# Altium PCB Luna_Board_PCB_D0.PcbDoc (part 2 of 2)
Units mm, origin at the board's own origin, x right, y up, seen from the top; angles counter-clockwise.
Board outline 53.97 x 25.4 mm, 4 copper layers (Top Layer, Layer 1, Layer 2, Bottom Layer), stack 1.587 mm thick; 65 components, 71 nets, 287 pads, 168 vias.
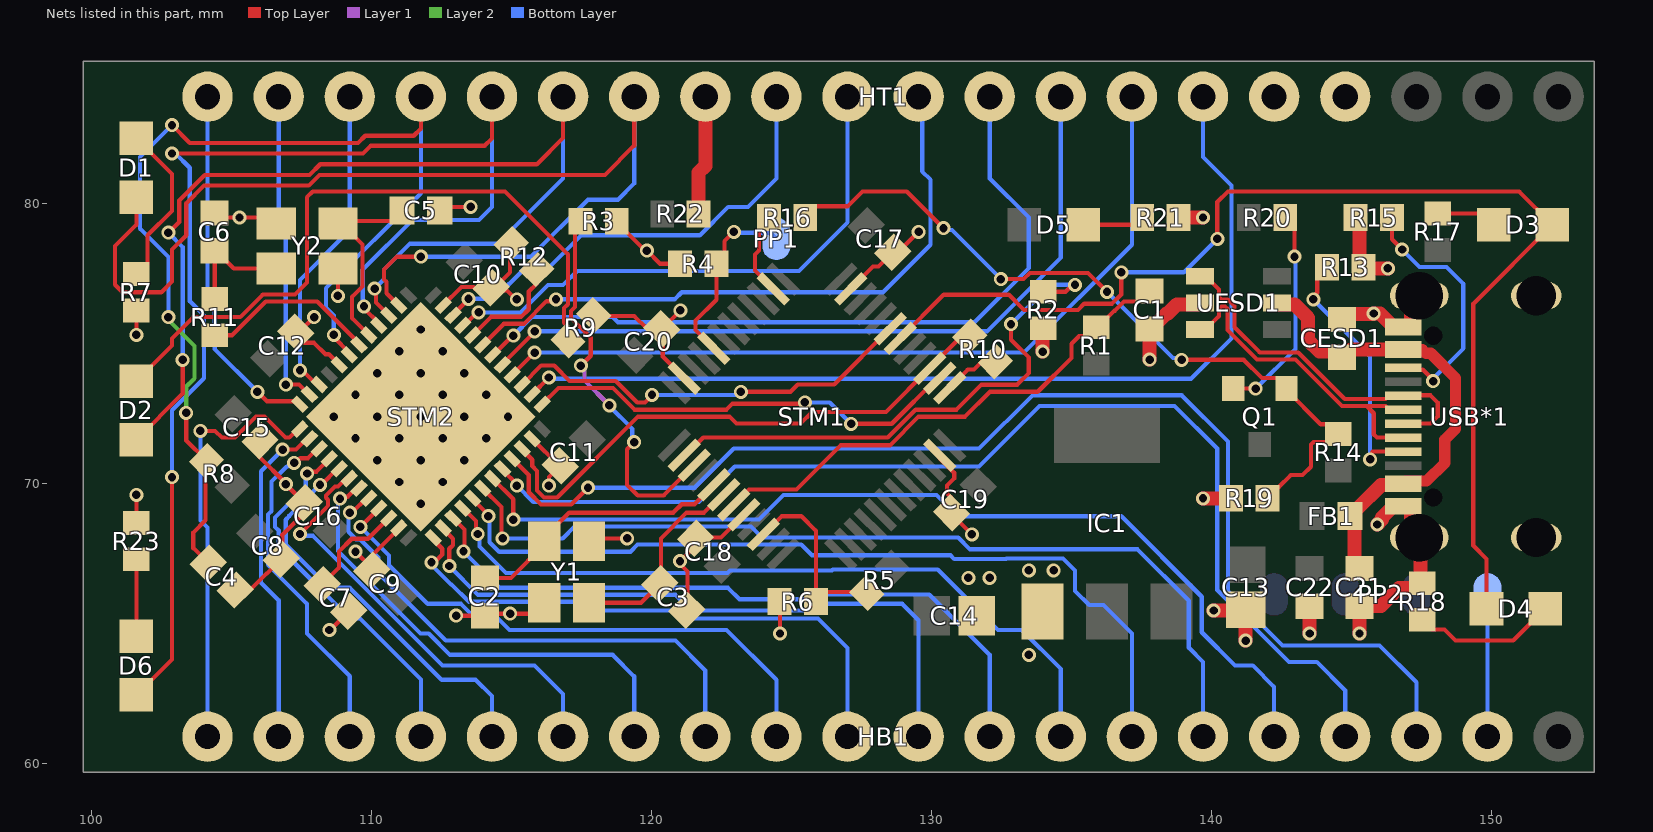
[diagram p4: the nets of this part, all layers, seen from the top]

## Via types
v1: diameter 0.5, hole 0.3, Top Layer to Bottom Layer, 168 vias

## Nets (pads, with @x,y where several pads share a name; then routed paths per layer and width w, separated by ;. In a path a pad name is that pad's centre, name@x,y a point inside that pad or via, vN(x,y) a via of type N, cw(c..) or ccw(c..) an arc to the next point about the centre after c; other vN are vias at no path point) (continued)
GND: C1.1 C2.1 C3.1 C4.1 C5.1 C6.1 C7.2 C8.1 C9.1 C10.1 C11.1 C12.1 C13.1 C14.1 C15.1 C16.1 C17.1 C18.1 C19.1 C20.1 C21.2 C22.2 CESD1.1 HB1.2 HT1.4 HT1.5 IC1.1 PP2.4 R2.1 R3.1 R4.1 R6.1 R7.2 R9.2 R12.1 R13.2 R15.2 R18.2 R19.1 R21.2 R23.2 STM1.8 STM1.23 STM1.35 STM1.47 STM2.8 STM2.23 STM2.35 STM2.47 UESD1.2 USB*1.1 USB*1.12 USB*1.13 Y1.2 Y1.4 Y2.2 Y2.4 | length 82.7
  Top Layer w0.15: R23.2@101.6,68.595 v1(101.6,69.596) ; v1(101.6,75.311) R7.2@101.6,76.185 ; C6.1@104.394,79.669 104.561,79.502 v1(105.283,79.502) 106.38,79.502 Y2.2@106.596,79.286 ; C4.1@105.125,66.198 105.656,66.198 106.246,66.789 106.264,66.789 106.812,67.337 106.812,68.17 107.6,68.958 C16.1@107.6,69.311 v1(106.934,69.977) 106.934,70.011 105.979,70.966 105.979,71.496 C15.1@106.014,71.532 ; C12.1@107.284,75.469 C12.1@107.284,75.407 107.411,75.407 v1(107.95,75.946) ; C12.1@107.411,75.026 107.942,75.026 108.351,74.617 108.472,74.617 STM2.8@108.843,74.246 ; v1(108.49,64.77) 108.524,64.77 C7.2@109.189,65.436 ; v1(108.796,76.708) Y2.4@108.796,77.686 ; v1(109.427,67.564) C9.1@110.013,66.978 ; C9.1@110.013,66.898 C9.1@110.013,66.978 ; STM2.23@110.965,68.413 110.965,68.38 110.013,67.429 C9.1@110.013,66.978 ; C5.1@112.435,79.756 112.562,79.883 v1(113.538,79.883) ; STM2.47@112.555,76.367 113.213,77.025 113.636,77.025 113.704,76.957 113.951,76.957 C10.1@114.057,76.851 ; v1(113.018,65.278) C2.1@114.046,65.278 114.119,65.351 v1(114.948,65.351) 115.776,65.351 Y1.2@116.167,65.742 ; C10.1@114.269,76.866 114.948,77.544 114.948,78.529 R12.1@114.983,78.565 ; C10.1@114.305,76.901 114.835,76.901 115.155,76.581 v1(115.189,76.581) ; STM2.35@115.737,71.595 116.689,70.643 C11.1@116.744,70.643 116.332,70.231 v1(116.332,69.926) ; Y1.4@117.767,67.942 117.866,68.041 v1(119.126,68.041) ; R9.2@117.935,76.025 117.97,75.989 119.38,75.989 119.835,75.534 C20.1@120.365,75.534 ; R3.1@118.76,79.375 118.76,79.325 119.766,78.319 v1(119.835,78.319) 120.303,77.851 R4.1@121.016,77.851 ; v1(121.031,76.185) 120.38,75.534 C20.1@120.365,75.534 ; STM1.47@121.169,73.769 120.401,74.537 120.401,75.499 C20.1@120.365,75.534 ; C3.1@121.254,65.466 121.29,65.502 121.29,66.856 121.016,67.13 v1(121.016,67.225) 121.57,67.778 C18.1@121.57,68.041 121.605,68.077 122.477,68.077 STM1.8@123.29,68.89 ; R6.1@124.572,65.786 124.587,65.771 v1(124.587,64.643) ; STM1.35@127.109,76.951 127.908,77.75 128.108,77.75 C17.1@128.62,78.263 128.809,78.263 v1(129.54,78.994) ; STM1.23@130.291,71.011 130.291,70.905 130.81,70.386 130.81,70.18 130.556,69.926 130.556,69.647 130.714,69.49 C19.1@130.714,68.959 130.714,68.914 v1(131.445,68.183)
  Top Layer w0.5: v1(133.971,74.709) 133.971,75.536 R2.1@133.985,75.55 ; v1(137.795,74.426) C1.1@137.795,75.525 137.845,75.525 138.395,76.075 138.44,76.075 138.769,76.404 139.545,76.404 UESD1.2@139.595,76.454 ; R21.2@138.826,79.502 v1(139.7,79.502) ; v1(139.7,69.473) 140.697,69.473 R19.1@140.701,69.469 ; v1(140.081,65.466) 141.196,65.466 C13.1@141.224,65.494 v1(141.224,64.389) ; v1(143.51,64.643) C22.2@143.51,65.619 ; CESD1.1@144.659,75.859 144.859,76.059 145.782,76.059 v1(145.796,76.073) 146.014,76.073 146.497,75.59 USB*1.12@146.847,75.59 147.085,75.59 147.135,75.64 147.135,76.479 147.366,76.71 USB*1.13@147.422,76.71 ; R15.2@145.146,79.502 145.288,79.36 145.288,77.866 R13.2@145.43,77.724 145.468,77.686 v1(146.304,77.686) ; v1(145.288,64.643) C21.2@145.288,65.619 146.053,65.619 146.695,66.261 147.354,66.261 R18.2@147.529,66.436 147.476,66.489 147.476,68.017 USB*1.13@147.422,68.07 147.366,68.07 147.135,68.301 147.135,69.14 147.085,69.19 USB*1.1@146.847,69.19 146.497,69.19 146.098,68.79 146.098,68.711 v1(145.923,68.536)
  Bottom Layer w0.15: HB1.2@149.86,60.96 PP2.4@149.86,66.04
  other v1: 133.477,63.881 131.318,66.628 132.08,66.628 133.477,66.898 134.366,66.898 111.76,69.279 110.982,70.057 112.538,70.057 110.204,70.834 111.76,70.834 113.316,70.834 109.427,71.612 110.982,71.612 112.538,71.612 114.093,71.612 108.649,72.39 110.204,72.39 111.76,72.39 113.316,72.39 114.871,72.39 109.427,73.168 110.982,73.168 112.538,73.168 114.093,73.168 110.204,73.946 111.76,73.946 113.316,73.946 110.982,74.723 112.538,74.723 111.76,75.501
LED: D3.2 D4.1 STM1.30 | length 42.7
  Top Layer w0.15: STM1.30@128.877,75.183 130.44,76.746 132.759,76.746 133.306,76.2 135.231,76.2 135.456,76.425 136.447,76.425 136.779,76.757 v1(136.779,77.544) ; v1(140.208,78.74) 140.208,80.054 140.589,80.435 150.993,80.435 D3.2@152.18,79.248 149.352,76.42 149.352,67.784 149.826,67.31 D4.1@149.826,65.532
  Bottom Layer w0.15: v1(136.779,77.544) 139.012,77.544 v1(140.208,78.74)
MCU_PA0: HT1.18 STM2.10 | length 11.4
  Top Layer w0.15: v1(107.442,74.041) 107.537,74.041 108.039,73.539 STM2.10@108.136,73.539
  Bottom Layer w0.15: v1(107.442,74.041) 107.442,77.276 109.22,79.054 HT1.18@109.22,83.82
MCU_PA1: HT1.19 STM2.11 | length 11.4
  Top Layer w0.15: v1(106.934,73.533) 107.409,73.533 107.757,73.185 STM2.11@107.783,73.185
  Bottom Layer w0.15: HT1.19@106.68,83.82 106.68,79.054 106.934,78.8 v1(106.934,73.533)
MCU_PA2: HT1.20 STM2.12 | length 13
  Top Layer w0.15: v1(105.918,73.279) 106.259,72.938 107.323,72.938 STM2.12@107.429,72.832
  Bottom Layer w0.15: HT1.20@104.14,83.82 104.14,76.854 104.394,76.6 104.394,74.803 v1(105.918,73.279)
MCU_PA3: HB1.20 STM2.13 | length 15.4
  Top Layer w0.15: v1(103.886,71.882) 104.409,71.882 104.651,71.64 105.124,71.64 105.873,72.389 106.178,72.389 106.928,71.64 107.061,71.64 107.369,71.948 STM2.13@107.429,71.948
  Bottom Layer w0.15: v1(103.886,71.882) 103.886,68.682 104.14,68.428 HB1.20@104.14,60.96
MCU_PA4: HB1.19 STM2.14 | length 11.9
  Top Layer w0.15: v1(106.826,71.212) 106.833,71.219 107.301,71.219 107.676,71.595 STM2.14@107.783,71.595
  Bottom Layer w0.15: HB1.19@106.68,60.96 106.68,65.83 106.053,66.457 106.053,70.439 v1(106.826,71.212)
MCU_PA5: HB1.18 STM2.15 | length 12.6
  Top Layer w0.15: v1(107.232,70.743) 107.284,70.743 107.448,70.907 107.728,70.907 108.062,71.241 STM2.15@108.136,71.241
  Bottom Layer w0.15: v1(107.232,70.743) 107.137,70.743 107.007,70.612 106.968,70.612 106.426,70.07 106.426,69.013 106.303,68.89 106.303,67.096 107.696,65.703 107.696,64.643 109.22,63.119 HB1.18@109.22,60.96
MCU_PA6: HB1.17 STM2.16 | length 13.2
  Top Layer w0.15: v1(107.696,70.358) 107.763,70.425 108.027,70.425 STM2.16@108.49,70.887
  Bottom Layer w0.15: v1(107.696,70.358) 107.649,70.311 107.649,69.883 106.553,68.787 106.553,68.453 106.684,68.322 106.684,67.726 109.228,65.182 109.583,65.182 111.76,63.005 HB1.17@111.76,60.96
MCU_PA7: HB1.16 STM2.17 | length 14.6
  Top Layer w0.15: v1(108.157,69.956) 108.211,69.956 108.789,70.534 STM2.17@108.843,70.534
  Bottom Layer w0.15: v1(108.157,69.956) 107.061,68.861 107.061,68.834 106.934,68.707 106.934,67.829 108.487,66.276 109.22,66.276 112.504,62.992 113.716,62.992 114.3,62.408 HB1.16@114.3,60.96
MCU_PA8: HB1.7 STM2.29 | length 30.4
  Top Layer w0.15: STM2.29@113.616,69.473 113.616,69.432 114.173,68.875 v1(114.173,68.834)
  Bottom Layer w0.15: v1(114.173,68.834) 114.217,68.79 114.217,67.904 114.557,67.564 119.25,67.564 119.504,67.818 125.349,67.818 125.73,67.437 130.683,67.437 130.81,67.31 132.669,67.31 132.683,67.323 134.703,67.323 135.128,66.898 135.128,66.167 135.636,65.659 136.144,65.659 137.16,64.643 HB1.7@137.16,60.96
MCU_PA9: HB1.6 STM2.30 | length 32.9
  Top Layer w0.15: STM2.30@113.97,69.827 114.637,69.159 114.637,68.085 v1(114.681,68.041)
  Bottom Layer w0.15: v1(114.681,68.041) 116.826,68.041 117.251,68.466 123.558,68.466 123.952,68.072 130.955,68.072 131.377,67.65 137.356,67.65 139.192,65.813 139.192,64.135 139.7,63.627 HB1.6@139.7,60.96
MCU_PA10: HB1.5 STM2.31 | length 34.7
  Top Layer w0.15: STM2.31@114.323,70.18 115.062,69.442 v1(115.062,68.707)
  Bottom Layer w0.15: v1@115.062,68.716 123.834,68.716 124.714,69.596 130.175,69.596 130.937,68.834 136.779,68.834 139.656,65.957 139.656,64.687 140.843,63.5 141.478,63.5 142.24,62.738 HB1.5@142.24,60.96
MCU_PA11: HB1.4 STM2.32 | length 40.9
  Top Layer w0.15: STM2.32@114.677,70.534 114.677,70.486 115.189,69.974 v1(115.189,69.926)
  Bottom Layer w0.15: v1(115.189,69.926) 115.773,69.342 121.7,69.342 122.97,70.612 131.699,70.612 133.858,72.771 138.684,72.771 140.208,71.247 140.208,66.194 142.775,63.627 143.764,63.627 144.78,62.611 HB1.4@144.78,60.96
MCU_PA12: HB1.3 STM2.33 | length 44.3
  Top Layer w0.15: STM2.33@115.03,70.887 115.614,70.304 115.614,69.69 116.052,69.251 117.13,69.251 v1(117.729,69.85)
  Bottom Layer w0.15: v1(117.729,69.85) 121.54,69.85 122.937,71.247 131.699,71.247 133.604,73.152 138.938,73.152 140.589,71.501 140.589,66.167 142.538,64.218 146.006,64.218 147.32,62.904 HB1.3@147.32,60.96
MCU_PA15: HT1.6 STM2.38 | length 34.9
  Top Layer w0.15: STM2.38@115.737,73.185 115.737,73.189 116.332,73.784 v1(116.332,73.787)
  Bottom Layer w0.15: v1(116.332,73.787) 116.376,73.743 139.275,73.743 140.716,75.184 140.716,80.645 139.7,81.661 HT1.6@139.7,83.82
MCU_PB0: HB1.15 STM2.18 | length 16.2
  Top Layer w0.15: v1(107.442,68.199) 108.446,69.203 108.446,69.419 108.37,69.496 108.37,69.569 108.695,69.894 108.804,69.894 109.091,70.18 STM2.18@109.197,70.18
  Bottom Layer w0.15: v1(107.442,68.199) 107.509,68.132 107.904,68.132 112.536,63.5 115.824,63.5 116.84,62.484 HB1.15@116.84,60.96
MCU_PB1: HB1.14 STM2.19 | length 17.3
  Top Layer w0.15: v1(108.871,69.461) 108.938,69.528 109.145,69.528 109.444,69.827 STM2.19@109.55,69.827
  Bottom Layer w0.15: v1(108.871,69.461) 108.804,69.394 108.804,69.147 108.795,69.137 108.795,67.595 111.747,64.643 112.041,64.643 112.803,63.881 118.613,63.881 119.38,63.114 HB1.14@119.38,60.96
MCU_PB2: HB1.13 STM2.20 | length 19.1
  Top Layer w0.15: v1(109.22,68.961) 109.306,68.961 109.818,69.473 STM2.20@109.904,69.473
  Bottom Layer w0.15: v1(109.22,68.961) 109.176,68.917 109.176,68.277 109.444,68.008 109.583,68.008 110.236,67.356 110.236,66.802 112.649,64.389 120.853,64.389 121.92,63.322 HB1.13@121.92,60.96
MCU_PB4: HT1.7 STM2.40 | length 29.3
  Top Layer w0.15: STM2.40@115.03,73.893 115.035,73.893 115.819,74.676 v1(115.824,74.676)
  Bottom Layer w0.15: v1(115.824,74.676) 133.304,74.676 137.16,78.532 HT1.7@137.16,83.82
MCU_PB5: HT1.8 STM2.41 | length 27.3
  Top Layer w0.15: STM2.41@114.677,74.246 114.677,74.268 115.824,75.416 v1(115.824,75.438)
  Bottom Layer w0.15: v1(115.824,75.438) 131.987,75.438 134.62,78.071 HT1.8@134.62,83.82
MCU_PB6: HT1.9 STM2.42 | length 27.3
  Top Layer w0.15: STM2.42@114.323,74.6 114.352,74.6 115.033,75.28 v1(115.062,75.28)
  Bottom Layer w0.15: v1(115.062,75.28) 115.728,75.946 118.613,75.946 118.799,75.76 131.535,75.76 133.477,77.702 133.477,79.502 132.08,80.899 HT1.9@132.08,83.82
MCU_PB7: HT1.10 STM2.43 | length 22.9
  Top Layer w0.15: STM2.43@113.97,74.953 114.721,75.705 115.445,75.705 116.254,76.514 116.519,76.514 v1(116.586,76.581)
  Bottom Layer w0.15: v1(116.586,76.581) 120.826,76.581 121.08,76.835 128.27,76.835 129.965,78.53 129.965,80.855 129.667,81.153 129.667,83.693 HT1.10@129.54,83.82
MCU_PB8: HT1.11 STM2.45 | length 19.7
  Top Layer w0.15: STM2.45@113.263,75.66 113.316,75.66 113.768,76.112 v1(113.821,76.112)
  Bottom Layer w0.15: v1(113.821,76.112) 115.321,76.112 116.298,77.089 116.84,77.089 117.348,77.597 125.266,77.597 127,79.331 HT1.11@127,83.82
MCU_PB9: HT1.12 STM2.46 | length 16.5
  Top Layer w0.15: STM2.46@112.909,76.014 112.909,76.032 113.46,76.582 v1(113.46,76.6)
  Bottom Layer w0.15: v1(113.46,76.6) 114.381,76.6 115.505,77.724 116.332,77.724 117.475,78.867 121.722,78.867 122.738,79.883 123.444,79.883 124.46,80.899 HT1.12@124.46,83.82
MCU_PB10: HB1.12 STM2.21 | length 20.3
  Top Layer w0.15: v1(109.601,68.453) 109.601,68.458 110.257,69.115 STM2.21@110.257,69.12
  Bottom Layer w0.15: v1(109.601,68.453) 110.626,67.428 110.626,67.081 112.004,65.703 113.194,65.703 113.716,65.182 114.516,65.182 114.928,64.77 122.682,64.77 124.46,62.992 HB1.12@124.46,60.96
MCU_PB12: HB1.11 STM2.25 | length 20.6
  Top Layer w0.15: v1(112.141,67.183) 112.239,67.183 112.522,67.466 112.522,67.671 112.202,67.991 STM2.25@112.202,68.059
  Bottom Layer w0.15: v1(112.141,67.183) 112.141,67.09 112.832,66.399 112.852,66.399 113.475,65.776 117.928,65.776 118.237,65.466 121.058,65.466 121.343,65.182 125.944,65.182 127,64.125 HB1.11@127,60.96
MCU_PB13: HB1.10 STM2.26 | length 23.5
  Top Layer w0.15: STM2.26@112.555,68.413 112.555,68.374 112.903,68.027 112.903,67.798 112.776,67.671 v1(112.776,67.056)
  Bottom Layer w0.15: v1(112.776,67.056) 113.806,66.026 120.853,66.026 121.412,65.466 126.008,65.466 126.245,65.703 128.954,65.703 129.54,65.117 HB1.10@129.54,60.96
MCU_PB14: HB1.9 STM2.27 | length 24.8
  Top Layer w0.15: STM2.27@112.909,68.766 113.315,68.36 113.315,67.608 v1(113.284,67.577)
  Bottom Layer w0.15: v1(113.284,67.577) 114.586,66.276 122.734,66.276 123.141,65.869 126.057,65.869 126.228,66.04 129.921,66.04 132.08,63.881 HB1.9@132.08,60.96
MCU_PB15: HB1.8 STM2.28 | length 26.7
  Top Layer w0.15: STM2.28@113.263,69.12 113.725,68.657 113.725,68.266 v1(113.792,68.199)
  Bottom Layer w0.15: v1(113.792,68.199) 113.859,68.132 113.859,67.747 114.806,66.8 122.71,66.8 122.809,66.898 126.448,66.898 126.475,66.925 130.224,66.925 132.379,64.77 133.223,64.77 134.62,63.373 HB1.8@134.62,60.96
MCU_PC13: D1.1 HT1.14 STM2.2 | length 42.2
  Top Layer w0.15: D1.1@101.6,80.23 101.6,79.248 100.838,78.486 100.838,77.1 101.103,76.835 102.489,76.835 102.87,77.216 102.87,78.359 103.378,78.867 103.378,80.01 104.013,80.645 107.757,80.645 108.138,81.026 118.337,81.026 119.38,82.069 HT1.14@119.38,83.82 ; STM2.2@110.965,76.367 110.534,76.798 110.534,77.206 110.446,77.294 110.446,77.646 110.905,78.105 v1(111.76,78.105)
  Bottom Layer w0.15: v1(111.76,78.105) 115.697,78.105 117.729,80.137 118.799,80.137 119.38,80.718 HT1.14@119.38,83.82
MCU_PC14: D2.1 HT1.15 STM2.3 | length 38.4
  Top Layer w0.15: D2.1@101.6,71.56 103.251,73.211 v1(103.251,74.422) ; v1(102.743,78.96) 103.128,79.345 103.128,80.114 104.04,81.026 107.785,81.026 108.166,81.407 115.903,81.407 116.84,82.344 HT1.15@116.84,83.82 ; v1(110.109,76.962) 110.153,76.918 110.153,76.472 STM2.3@110.611,76.014
  Bottom Layer w0.15: v1(102.743,78.96) 103.251,78.452 v1(103.251,74.422) ; v1(110.109,76.962) 110.446,77.299 110.446,77.646 111.369,78.569 114.51,78.569 116.84,80.899 HT1.15@116.84,83.82
MCU_PC15: D6.1 HT1.16 STM2.4 | length 45.7
  Top Layer w0.15: D6.1@101.6,62.45 102.87,63.72 v1(102.87,70.231) ; v1(102.87,81.788) 109.691,81.788 109.972,82.069 114.044,82.069 114.305,82.33 114.305,83.815 HT1.16@114.3,83.82 ; v1(109.728,76.327) 109.728,76.258 110.257,75.729 STM2.4@110.257,75.66
  Bottom Layer w0.15: v1(102.87,70.231) 102.87,72.62 104.013,73.763 104.013,76.006 103.505,76.514 103.505,81.28 102.997,81.788 v1(102.87,81.788) ; v1(109.728,76.327) 109.684,76.371 109.684,77.646 111.457,79.419 113.836,79.419 114.3,79.883 HT1.16@114.3,83.82
MCU_VBAT: HT1.13 R22.2 | length 4.3
  Top Layer w0.5: R22.2@121.681,79.629 121.681,81.113 121.92,81.352 HT1.13@121.92,83.82
NetC1_2: C1.2 R1.2 STM1.7 | length 18.3
  Top Layer w0.15: STM1.7@122.937,69.243 123.485,69.791 125.182,69.791 126.755,71.365 128.515,71.365 129.54,72.389 131.198,72.389 132.088,73.279 133.794,73.279 135.001,74.486 135.001,74.992 135.271,75.263 135.573,75.263 R1.2@135.89,75.58 135.94,75.58 136.535,76.175 136.551,76.175 136.876,76.5 137.42,76.5 C1.2@137.795,76.875
NetC2_2: C2.2 STM1.5 Y1.1 | length 9.7
  Top Layer w0.15: C2.2@114.046,66.628 114.978,66.628 116.167,67.817 Y1.1@116.167,67.942 116.167,68.067 117.059,68.959 120.777,68.959 121.078,69.26 121.54,69.26 STM1.5@122.23,69.95
NetC3_2: C3.2 STM1.6 Y1.3 | length 7.3
  Top Layer w0.15: Y1.3@117.767,65.742 119.621,65.742 C3.2@120.3,66.421 120.335,66.456 120.335,68.042 121.252,68.959 121.876,68.959 122.514,69.597 STM1.6@122.583,69.597
NetC6_2: C6.2 R11.1 Y2.3 | length 4.2
  Top Layer w0.15: R11.1@104.394,76.596 C6.2@104.394,78.319 104.444,78.319 105.077,77.686 Y2.3@106.596,77.686
NetC7_1: C7.1 STM2.22 | length 3.7
  Top Layer w0.15: C7.1@108.235,66.39 108.839,66.995 108.839,67.577 109.29,68.028 109.873,68.028 STM2.22@110.611,68.766
NetD1_2: D1.2 R7.1 | length 5.9
  Top Layer w0.15: R7.1@101.6,77.485 101.65,77.485 102,77.835 102,78.869 102.87,79.739 102.87,81.06 D1.2@101.6,82.33
NetD2_2: D2.2 R9.1 | length 24.3
  Top Layer w0.15: D2.2@101.6,73.66 102.87,74.93 102.87,75.183 103.633,75.946 105.31,75.946 106.114,76.75 107.267,76.75 107.696,77.179 107.696,80.23 107.897,80.431 114.768,80.431 117.011,78.188 117.011,76.405 116.873,76.267 116.873,75.743 117.015,75.6 R9.1@117.015,75.105
NetD3_1: D3.1 R17.2 | length 2.2
  Top Layer w0.15: R17.2@148.082,79.644 149.684,79.644 D3.1@150.08,79.248
NetD4_2: D4.2 R18.1 | length 5.2
  Top Layer w0.15: R18.1@147.529,65.136 147.879,64.786 148.32,64.786 148.717,64.389 150.783,64.389 D4.2@151.926,65.532
NetD5_2: D5.2 R21.1 | length 2.2
  Top Layer w0.15: D5.2@135.416,79.248 137.272,79.248 R21.1@137.526,79.502
NetD6_2: D6.2 R23.1 | length 2.7
  Top Layer w0.15: D6.2@101.6,64.55 R23.1@101.6,67.295
NetPP1_1: PP1.1 R4.2 STM1.44 | length 6.6
  Top Layer w0.15: STM1.44@122.23,74.83 121.57,75.49 121.57,75.819 122.316,76.565 R4.2@122.316,77.851 122.601,78.136 122.601,78.658 v1(122.937,78.994)
  Bottom Layer w0.15: v1(122.937,78.994) 122.97,78.96 124.24,78.96 PP1.1@124.46,78.74
NetQ1_1: Q1.1 R14.1 R16.1 R19.2 | length 27.3
  Top Layer w0.15: R16.1@125.491,79.502 125.491,79.552 125.841,79.902 127.004,79.902 127.537,80.435 129.115,80.435 v1(130.429,79.121) ; v1(132.478,77.304) 133.292,77.304 133.514,77.526 135.595,77.526 v1(136.271,76.85) ; v1(138.938,74.422) 141.151,74.422 141.808,73.765 142.357,73.765 142.682,73.44 Q1.1@142.682,73.39 142.682,73.34 143.902,72.12 144.176,72.12 R14.1@144.526,71.77 144.234,71.478 143.641,71.478 143.554,71.39 143.554,70.602 143.256,70.304 142.836,70.304 142.401,69.869 142.351,69.869 142.001,69.519 R19.2@142.001,69.469
  Bottom Layer w0.15: v1(130.429,79.121) 130.496,79.054 130.728,79.054 v1(132.478,77.304) ; v1(136.271,76.85) 138.632,74.489 138.871,74.489 v1(138.938,74.422)
NetQ1_2: Q1.2 R20.2 | length 7.7
  Top Layer w0.15: Q1.2@140.782,73.39 v1(141.582,73.39) ; R20.2@142.636,79.502 142.965,79.173 v1(142.965,78.105)
  Bottom Layer w0.15: v1(141.582,73.39) 143.002,74.81 143.002,78.068 v1(142.965,78.105)
NetR2_2: R2.2 STM1.2 | length 19.6
  Top Layer w0.15: STM1.2@121.169,71.011 121.22,71.011 121.848,71.64 128.437,71.64 129.436,72.639 130.895,72.639 131.788,73.532 133.063,73.532 133.477,73.946 133.477,74.501 132.842,75.136 v1(132.842,75.692) ; R2.2@133.985,76.85 134.782,76.85 135.033,77.101 v1(135.128,77.101)
  Bottom Layer w0.15: v1(132.842,75.692) 134.251,77.101 v1(135.128,77.101)
NetR3_2: R3.2 STM1.3 | length 13.9
  Top Layer w0.15: R3.2@117.46,79.375 117.261,79.176 117.261,76.301 117.123,76.164 117.123,75.917 117.827,75.213 117.827,74.564 v1(117.475,74.212) ; v1(119.38,71.478) 119.126,71.224 119.126,69.95 119.508,69.569 120.434,69.569 STM1.3@121.523,70.658
  Layer 1 w0.15: v1(117.475,74.212) 117.514,74.212 117.602,74.124 117.602,73.684 v1(118.491,72.795)
  Bottom Layer w0.15: v1(118.491,72.795) 118.491,72.771 119.313,71.949 119.313,71.545 v1(119.38,71.478)
NetR5_1: R5.1 R6.2 STM1.10 | length 6.9
  Top Layer w0.15: STM1.10@123.998,68.183 124.003,68.183 124.654,68.834 125.349,68.834 125.872,68.311 R6.2@125.872,65.786 126.21,66.124 127.648,66.124 R5.1@127.683,66.088
NetR10_1: R10.1 STM1.25 | length 2
  Top Layer w0.15: STM1.25@130.644,73.415 131.298,74.069 131.517,74.069 131.791,74.343 R10.1@132.286,74.343
NetR12_2: R12.2 STM2.44 | length 3.9
  Top Layer w0.15: STM2.44@113.616,75.307 114.264,75.955 115.341,75.955 115.614,76.228 115.614,76.862 115.903,77.15 R12.2@115.903,77.645
NetR13_1: R13.1 USB*1.4 | length 9.3
  Top Layer w0.15: v1(143.637,76.581) 143.637,76.676 143.78,76.819 143.78,77.374 R13.1@144.13,77.724 ; v1(145.669,70.866) 145.736,70.933 145.736,71.119 145.757,71.14 USB*1.4@146.847,71.14
  Bottom Layer w0.15: v1(143.637,76.581) 145.669,74.549 v1(145.669,70.866)
NetR15_1: R15.1 USB*1.10 | length 9.2
  Top Layer w0.15: R15.1@146.446,79.502 146.446,78.725 v1(146.812,78.359) ; USB*1.10@146.847,74.14 146.922,74.065 147.551,74.065 147.922,73.693 v1(147.922,73.66)
  Bottom Layer w0.15: v1(146.812,78.359) 147.436,77.735 148.397,77.735 148.997,77.135 148.997,74.829 147.922,73.754 v1(147.922,73.66)
NRST: C4.2 HT1.17 R8.2 STM2.7 | length 39.2
  Top Layer w0.15: v1(102.87,82.804) 103.505,82.169 109.518,82.169 109.772,82.423 111.506,82.423 111.76,82.677 HT1.17@111.76,83.82 ; v1(103.378,72.527) 103.378,71.541 R8.2@104.101,70.818 104.066,70.782 104.066,68.69 103.632,68.256 103.632,67.691 C4.2@104.171,67.152 ; v1(108.649,75.311) 108.649,75.229 109.197,74.681 STM2.7@109.197,74.6
  Layer 2 w0.15: v1(102.743,75.946) 102.743,75.843 103.676,74.91 103.676,73.759 103.378,73.461 v1(103.378,72.527)
  Bottom Layer w0.15: v1(102.743,75.946) 102.743,78.089 101.727,79.105 101.727,81.661 v1(102.87,82.804) ; v1(108.649,75.311) 108.649,76.006 108.371,76.284 108.371,76.979 111.76,80.368 HT1.17@111.76,83.82
OSC_IN: C5.2 STM2.5 Y2.1 | length 7.3
  Top Layer w0.15: STM2.5@109.904,75.307 109.303,75.908 109.303,76.671 109.671,77.039 109.671,78.536 108.921,79.286 Y2.1@108.796,79.286 108.891,79.381 110.71,79.381 C5.2@111.085,79.756
OSC_OUT: R11.2 STM2.6 | length 6.3
  Top Layer w0.15: R11.2@104.394,75.296 105.014,75.296 106.218,76.5 108.061,76.5 109.55,75.01 STM2.6@109.55,74.953
RENUM: R16.2 STM1.38 | length 3
  Top Layer w0.15: R16.2@124.191,79.502 123.841,79.152 123.841,78.322 123.698,78.179 123.698,77.606 STM1.38@124.351,76.951 STM1.38@124.351,76.951
T_CLK: STM1.26 STM2.37 | length 15.9
  Top Layer w0.15: STM2.37@116.091,72.832 116.674,73.415 118.618,73.415 119.394,72.639 122.68,72.639 122.894,72.854 125.432,72.854 v1(125.476,72.898) ; v1(127.127,72.136) 128.58,72.136 130.212,73.769 STM1.26@130.291,73.769
  Bottom Layer w0.15: v1(125.476,72.898) 126.365,72.898 v1(127.127,72.136)
T_DIO: R10.2 STM1.27 STM2.34 | length 19.9
  Top Layer w0.15: STM2.34@115.384,71.241 115.384,71.206 115.737,70.852 115.737,70.622 115.907,70.452 115.907,69.75 116.156,69.501 116.633,69.501 119.521,72.389 122.783,72.389 123.033,72.14 125.319,72.14 125.74,72.561 128.376,72.561 STM1.27@129.937,74.122 131.077,75.263 R10.2@131.366,75.263
T_SWO: STM1.31 STM2.39 | length 15.1
  Top Layer w0.15: STM2.39@115.384,73.539 116.057,74.212 116.524,74.212 117.071,73.665 118.722,73.665 119.489,72.898 119.761,72.898 120.015,73.152 v1(120.015,73.168) ; v1(123.19,73.279) 124.962,73.279 125.222,73.539 126.525,73.539 STM1.31@128.523,75.537
  Bottom Layer w0.15: v1(120.015,73.168) 123.079,73.168 v1(123.19,73.279)
USB_N: UESD1.3 USB*1.5 USB*1.7 | length 11.9
  Top Layer w0.15: UESD1.3@139.595,75.504 139.795,75.504 140.27,75.979 140.27,76.241 140.358,76.329 140.482,76.329 140.57,76.241 140.57,75.48 141.624,74.426 142.998,74.426 144.659,72.765 145.542,72.765 ; USB*1.5@146.847,71.64 145.911,71.64 145.796,71.755 145.796,72.511 145.542,72.765 ; USB*1.7@146.847,72.64 146.347,72.64 146.222,72.765 145.542,72.765
USB_P: UESD1.1 USB*1.6 USB*1.8 | length 12.9
  Top Layer w0.15: UESD1.1@139.595,77.404 139.795,77.404 140.27,76.929 140.27,76.667 140.358,76.579 140.586,76.579 140.82,76.345 140.82,75.584 141.728,74.676 143.102,74.676 144.763,73.015 146.222,73.015 146.347,73.14 USB*1.8@146.847,73.14 ; USB*1.8@146.812,73.152 147.828,73.152 148.082,72.898 148.082,72.39 147.832,72.14 USB*1.6@146.847,72.14
VBUS: C21.1 CESD1.2 FB1.2 UESD1.5 USB*1.2 USB*1.11 | length 17.6
  Top Layer w0.4: USB*1.2@146.847,69.99 146.947,70.09 147.687,70.09 148.336,70.739 148.336,71.567 148.717,71.948 148.717,73.772 147.834,74.655 147.664,74.655 147.529,74.79 USB*1.11@146.847,74.79
  Top Layer w0.5: UESD1.5@142.345,76.454 142.395,76.404 142.965,76.404 143.448,75.922 143.448,75.119 143.858,74.709 144.459,74.709 CESD1.2@144.659,74.509 144.709,74.509 144.99,74.79 USB*1.11@146.847,74.79 ; C21.1@145.288,66.969 145.117,67.139 145.117,68.663 FB1.2@144.947,68.834 144.947,68.884 145.147,69.084 145.197,69.084 146.053,69.94 146.797,69.94 USB*1.2@146.847,69.99
pads on no net: STM1.4 STM1.11 STM1.12 STM1.13 STM1.14 STM1.15 STM1.16 STM1.17 STM1.18 STM1.19 STM1.20 STM1.21 STM1.22 STM1.28 STM1.29 STM1.39 STM1.40 STM1.41 STM1.42 STM1.43 STM1.45 STM1.46 USB*1. USB*1.3 USB*1.9

## Polygon pours and split planes (outlines as drawn)
GND on Top Layer "GND_L01_P010" (solid, pour order 10): 99.695,85.09 153.67,85.09 153.67,59.69 99.695,59.69
+3V3 on Top Layer "+3V3_L01_P008" (solid, pour order 8): 134.366,72.765 133.858,72.257 133.858,70.262 135.509,68.611 135.509,64.389 137.033,64.389 137.033,68.439 138.826,70.232 138.826,72.389 138.45,72.765
no net on Top Layer "Top Layer-No Net" (solid, pour order 6): 135.509,64.389
GND on Top Layer "GND_L01_P004" (solid, pour order 4): 130.937,64.55 130.937,66.802 131.191,67.056 132.984,67.056 133.238,67.31 134.703,67.31 134.874,67.139 134.874,64.389 133.985,63.5 133.003,63.5 131.953,64.55
GND on Bottom Layer "GND_L04_P012" (solid, pour order 12): 99.695,85.09 153.67,85.09 153.67,59.69 99.695,59.69
GND on Layer 1 "GND_L02_P000" (solid, pour order 0): 99.695,85.09 153.67,85.09 153.67,59.69 99.695,59.69
+3V3 on Layer 2 "+3V3_L03_P002" (solid, pour order 2): 99.695,85.09 153.67,85.09 153.67,59.69 99.695,59.69

## Silkscreen, mask and mechanical layers (free items; w line width, h text height)
Top Overlay:
  text "A2" at 103.886,82.296 h0.6 r270
  text "A1" at 106.426,82.296 h0.6 r270
  text "A0" at 108.966,82.296 h0.6 r270
  text "RST" at 111.506,82.296 h0.6 r270
  text "C15" at 114.046,82.296 h0.6 r270
  text "C14" at 116.586,82.296 h0.6 r270
  text "C13" at 119.126,82.296 h0.6 r270
  text "BAT" at 121.666,82.296 h0.6 r270
  text "B9" at 124.206,82.296 h0.6 r270
  text "B8" at 126.746,82.296 h0.6 r270
  text "B7" at 129.286,82.296 h0.6 r270
  text "B6" at 131.826,82.296 h0.6 r270
  text "B5" at 134.366,82.296 h0.6 r270
  text "B4" at 136.906,82.296 h0.6 r270
  text "A15" at 139.446,82.296 h0.6 r270
  text "GND" at 141.986,82.296 h0.6 r270
  text "GND" at 144.526,82.296 h0.6 r270
  text "3V3" at 147.066,82.296 h0.6 r270
  text "3V3" at 149.606,82.296 h0.6 r270
  text "5V" at 152.146,82.296 h0.6 r270
  text "B10" at 124.206,64.008 h0.6 r270
  text "B12" at 126.746,64.008 h0.6 r270
  text "B13" at 129.286,64.008 h0.6 r270
  text "B14" at 131.826,64.008 h0.6 r270
  text "B15" at 134.366,64.008 h0.6 r270
  text "A10" at 141.986,64.008 h0.6 r270
  text "A11" at 144.526,64.008 h0.6 r270
  text "A12" at 147.066,64.008 h0.6 r270
  text "GND" at 149.606,64.008 h0.6 r270
  text "3V3" at 152.146,64.008 h0.6 r270
  text "A3" at 103.888,63.757 h0.6 r270
  text "A4" at 106.428,63.757 h0.6 r270
  text "A5" at 108.968,63.757 h0.6 r270
  text "A6" at 111.508,63.757 h0.6 r270
  text "A7" at 114.048,63.757 h0.6 r270
  text "B0" at 116.588,63.757 h0.6 r270
  text "B1" at 119.128,63.757 h0.6 r270
  text "B2" at 121.668,63.757 h0.6 r270
  text "A8" at 136.906,63.754 h0.6 r270
  text "A9" at 139.446,63.754 h0.6 r270
Bottom Overlay:
  text "ARAF ISRAK" at 152.4,81.28 h0.6
  text "COSMIC LUNA BOARD V 1.0" at 152.4,80.264 h0.6
  text "STM32F411CEU6" at 152.4,79.248 h0.6
  text "Date: 25.03.2025" at 113.538,63.246 h0.6
  text "COSMIC LUNA" at 123.444,63.246 h0.8
Mechanical 1:
  the board outline again, w0.3